# Altium PCB PS2 CONECTOR.PcbDoc
Units mm, origin at the board's own origin, x right, y up, seen from the top; angles counter-clockwise.
Board outline 152.4 x 101.6 mm, 2 copper layers (Top Layer, Bottom Layer); 9 components, 7 nets, 43 pads, 0 vias.
Unrouted connection lines stored in the file: 2.
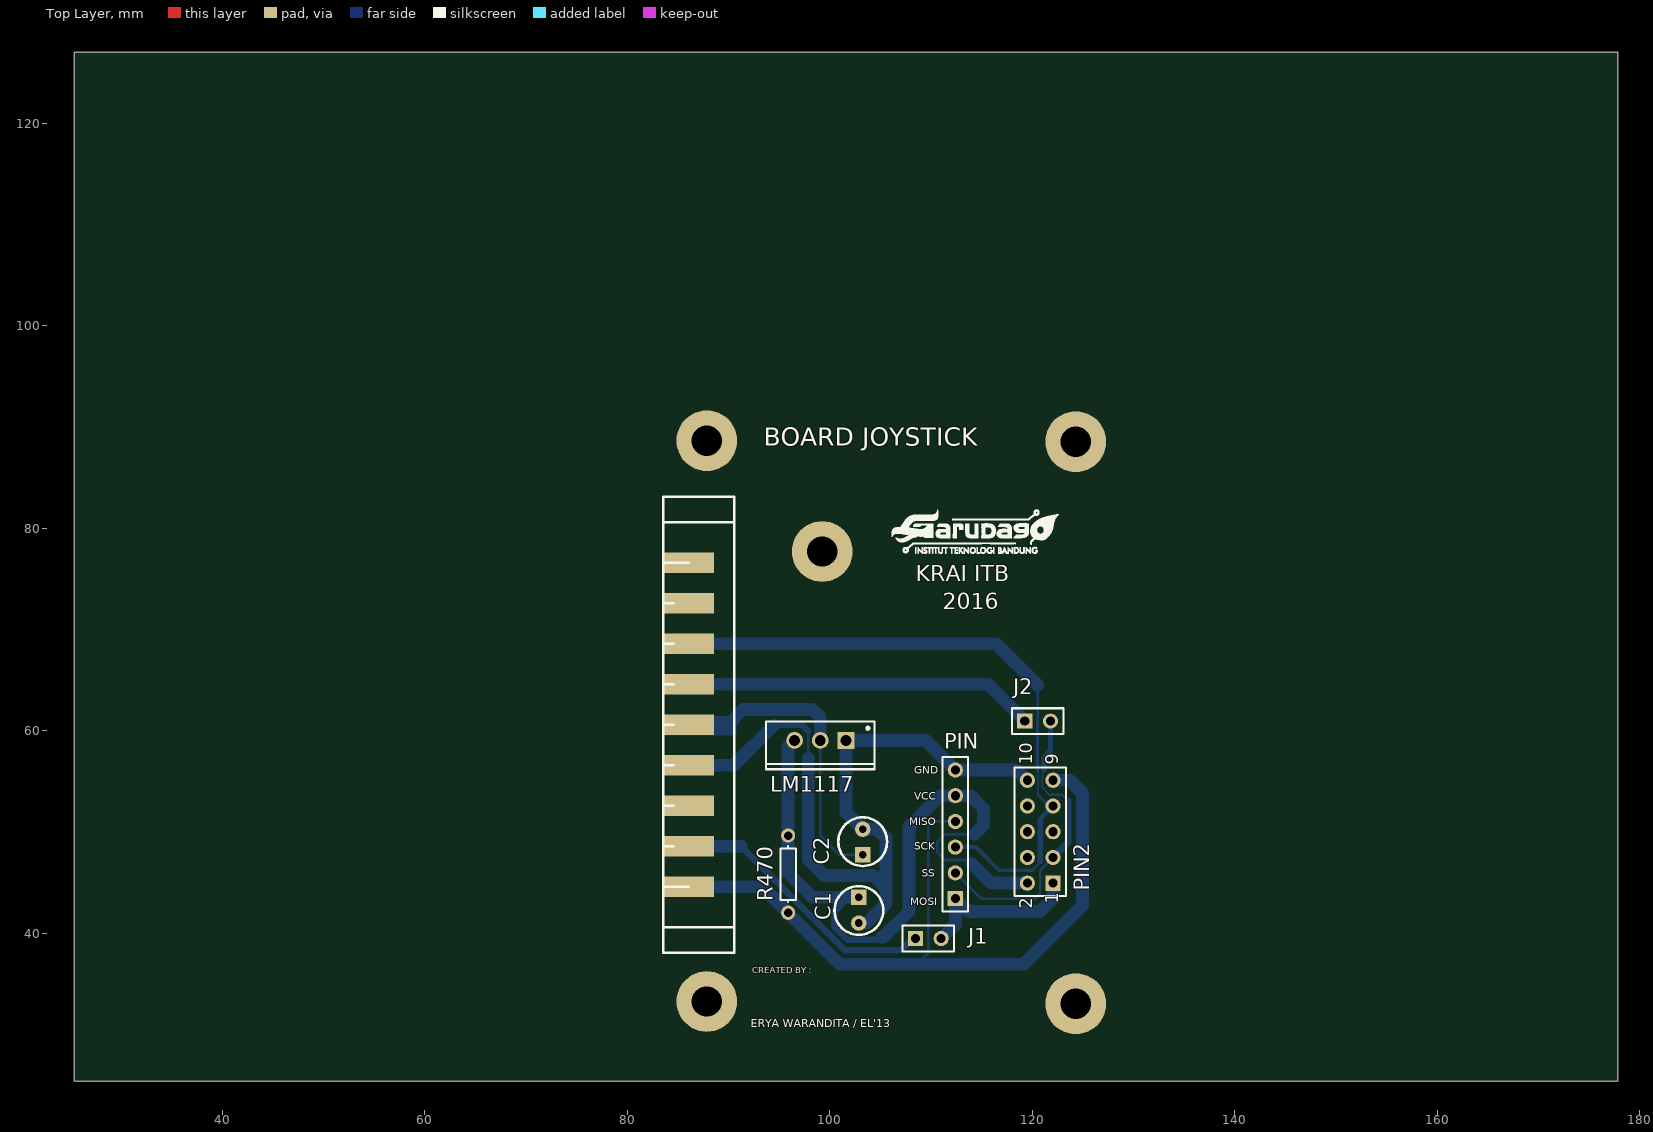
[diagram p0: Top Layer view]
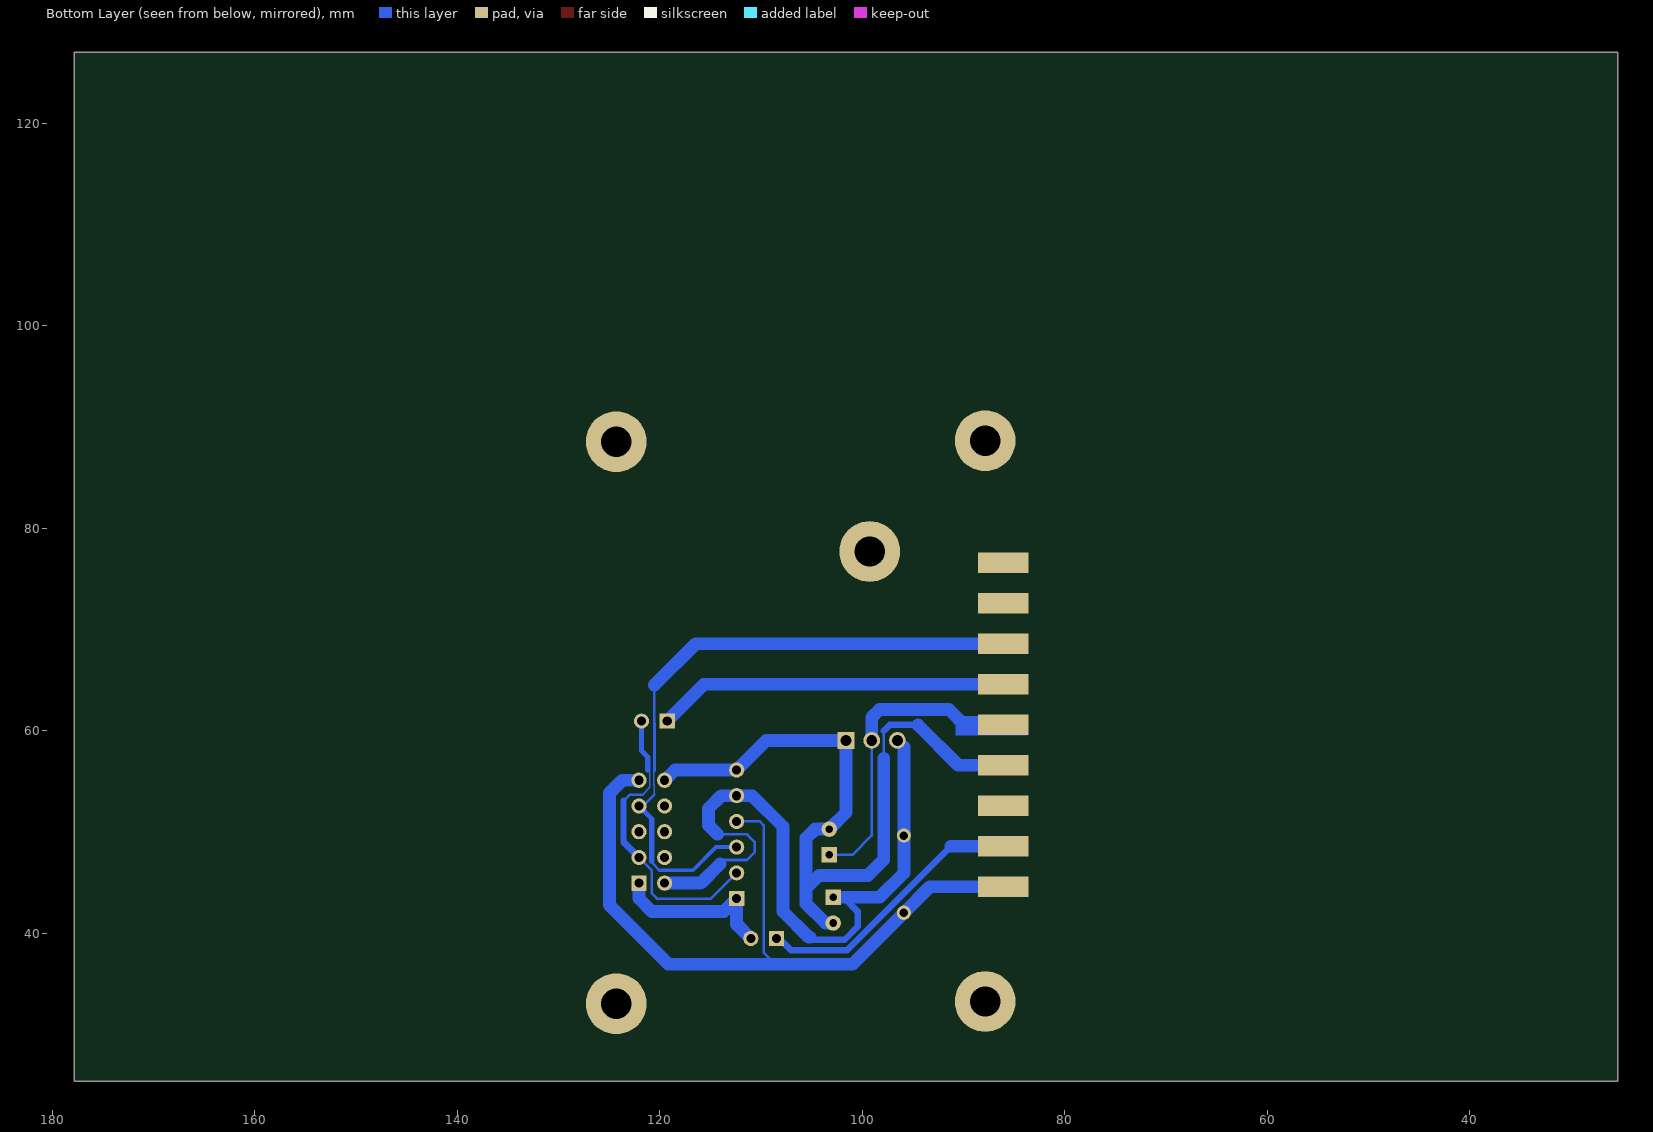
[diagram p1: Bottom Layer view, seen from below]

## Layer stack, top to bottom
Top Layer: signal copper 0.0356
Dielectric: dielectric 0.32, FR-4, Dk 4.8
Bottom Layer: signal copper 0.0356

## Board outline
25.4,25.4 177.8,25.4 177.8,127 25.4,127

## Design rules (kind name [scope] priority, off if disabled: settings)
Clearance [All] p1: gap=0.254
PolygonConnect [All] p1: connectstyle=Relief reliefconductorwidth=0.254 reliefentries=4 polygonreliefangle="90 Angle" airgapwidth=0.254
RoomDefinition "PS2 CONECTOR" [InComponentClass('PS2 CONECTOR')] p1: confinementstyle=ConfineIn formatcopy=TRUE lockcomponents=FALSE outline 82.042,29.21 128.651,29.21 128.651,92.964 82.042,92.964
RoutingVias [All] p1: holewidth=0.711 width=1.27 viastyle="Through Hole" minholewidth=0.711 minwidth=1.27 maxholewidth=0.711 maxwidth=1.27
SolderMaskExpansion [All] p1: expansion=0.102
Width [All] p1: maxlimit=1.27 minlimit=0.051 preferedwidth=0.127
28 further rules are at their usual default settings.

## Classes and differential pairs
component class "PS2 CONECTOR": "BOARD JOYSTICK" C1 C2 LM1117 PIN PIN2 R470

## Components (designator, comment, footprint, x,y, rotation, side; value= is the part's Value field where it differs from the comment)
"BOARD JOYSTICK" "JOYSTICK SOCKET" "JOY SOCKET" 83.566,38.1 r0 top (schematic designator JOYSTICK)
C1 "cap 10uF/16V" "cap 10uF/16V" 102.87,41.021 r270 top
C2 "cap 10uF/16V" "cap 10uF/16V" 103.251,50.292 r90 top
J1 "Comment" HDR1X2 108.458,39.497 r0 top
J2 "Comment" HDR1X2 119.253,60.96 r0 top
LM1117 "LM1117T-3.3" T03B 99.06,59.055 r180 top
PIN "Header 6" HDR1X6 112.395,43.434 r90 top
PIN2 "Header 5X2" HDR2X5 122.047,44.958 r90 top
R470 "Res1" AXIAL-0.3 95.885,45.847 r90 top

## Footprints (in the part's own frame and the unit in brackets; to place one, negate y for a bottom-side part, rotate by r counter-clockwise, add the part's x,y. Pads: shape width x height; smd on the part's side, far side on the other; paste and mask are expansions set on the pad)
AXIAL-0.3 [mm] "Axial Device, Thru-Hole; 2 Leads; 0.3 in Pin Spacing"
  round 1.4 hole 0.85: 1(-3.81,0) 2(3.81,0)
  silkscreen extent -2.77,-0.76 2.77,0.76
"cap 10uF/16V" [mil]
  rect 60x60 hole 30: 1(-100,0)
  round 60 hole 30: 2(0,0)
  silkscreen extent -144,-95 46,95
HDR1X2 [mm] "Connector; Header; 2 Position"
  rect 1.5x1.5 hole 0.9: 1(0,0)
  round 1.5 hole 0.9: 2(2.54,0)
  silkscreen extent -1.27,-1.27 3.81,1.27
HDR1X6 [mm] "Connector; Header; 6 Position"
  rect 1.5x1.5 hole 0.9: 1(0,0)
  round 1.5 hole 0.9: 2(2.54,0) 3(5.08,0) 4(7.62,0) 5(10.16,0) 6(12.7,0)
  silkscreen extent -1.27,-1.27 13.97,1.27
HDR2X5 [mm] "Connector; Header; 5x2 Position"
  rect 1.5x1.5 hole 0.9: 1(0,0)
  round 1.5 hole 0.9: 2(0,2.54) 3(2.54,0) 4(2.54,2.54) 5(5.08,0) 6(5.08,2.54) 7(7.62,0) 8(7.62,2.54) 9(10.16,0) 10(10.16,2.54)
  silkscreen extent -1.27,-1.27 11.43,3.81
"JOY SOCKET" [mm]
  rect 5x2 all layers, no hole: 1(2.5,6.5) 2(2.5,10.5) 3(2.5,14.5) 4(2.5,18.5) 5(2.5,22.5) 6(2.5,26.5) 7(2.5,30.5) 8(2.5,34.5) 9(2.5,38.5)
  silkscreen extent 0,0 7,45
T03B [mil] "TO, Thru-Hole, Vertical, Heatsink Mounted; 3 In-Line Leads; Pitch 2.54 mm"
  rect 65x65 hole 42.01: 1(-100,0)
  round 65 hole 42.01: 2(0,0) 3(100,0)
  silkscreen extent -211,-73 211,112, body extent -213,-75 213,114, height 764

## Part data
"BOARD JOYSTICK": library part "Socket joystick"
LM1117: "800mA Low-Dropout Linear Regulator, 3-pin TO-220"
PIN: "Header, 6-Pin"
PIN2: "Header, 5-Pin, Dual row"
R470: "Resistor"

## Free pads (board coordinates)
  round 6 hole 3: 11(87.86,33.276) 11(87.86,88.648) 11(99.258,77.709) 11(124.29,33.053) 11(124.29,88.552)

## Nets (pads, with @x,y where several pads share a name; then routed paths per layer and width w, separated by ;. In a path a pad name is that pad's centre, name@x,y a point inside that pad or via, vN(x,y) a via of type N, cw(c..) or ccw(c..) an arc to the next point about the centre after c; other vN are vias at no path point)
GND: "BOARD JOYSTICK.4" C1.2 C2.2 LM1117.1 PIN2.10 PIN.6 | length 76.8
  Bottom Layer w0.203: 97.875,57.277 97.875,59.986
  Bottom Layer w0.254: 97.853,60.008 97.875,59.986
  Bottom Layer w0.635: 94.488,60.579 97.282,60.579 97.853,60.008 97.853,59.986
  Bottom Layer w1.27: 86.066,56.6 90.509,56.6 94.488,60.579 ; 97.875,57.277 97.875,47.286 99.441,45.72 104.267,45.72 105.537,44.45 ; C1.2 103.632,41.021 105.537,42.926 105.537,44.45 ; PIN2.10 118.491,56.134 PIN.6 109.474,59.055 LM1117.1 101.6,51.943 C2.2 104.648,50.292 105.537,49.403 105.537,44.45
MISO: "BOARD JOYSTICK.1" PIN2.9 PIN.4 R470.1 | length 89.3
  Bottom Layer w0.254: 108.585,36.957 109.728,38.1 109.728,50.673 110.109,51.054 PIN.4 ; 123.698,55.118 124.079,55.118 124.587,54.61 124.587,54.229 124.587,42.418
  Bottom Layer w1.27: 86.066,44.6 93.322,44.6 R470.1 100.965,36.957 108.585,36.957 119.126,36.957 124.587,42.418 124.968,42.799 124.968,53.848 124.587,54.229 123.698,55.118 PIN2.9
MOSI: "BOARD JOYSTICK.2" J1.1 J1.2 PIN2.1 PIN.1 | length 43.9
  Bottom Layer w0.254: J1.1@108.204,39.497 J1.1
  Bottom Layer w0.635: 91.227,48.6 101.473,38.354 107.061,38.354 J1.1@108.204,39.497
  Bottom Layer w1.27: 86.066,48.6 91.227,48.6 ; J1.2 112.395,40.894 PIN.1 113.665,42.164 120.777,42.164 122.047,43.434 PIN2.1
SCK: "BOARD JOYSTICK.7" PIN2.7 PIN.3 | length 69
  Bottom Layer w0.127: 120.523,53.721 120.523,54.624 120.575,54.676 120.575,60.273 120.523,60.325
  Bottom Layer w0.254: 120.015,46.228 120.777,46.99 ; 120.523,53.721 121.666,52.578 PIN2.7 ; 120.523,64.516 120.523,60.706 120.511,60.694 120.511,56.031 120.535,56.007
  Bottom Layer w0.381: PIN.3 114.427,48.514 116.713,46.228 120.015,46.228
  Bottom Layer w0.508: 120.765,47.114 120.777,47.126 120.777,51.308 PIN2.7
  Bottom Layer w1.27: 86.066,68.6 116.439,68.6 120.523,64.516
SS: "BOARD JOYSTICK.6" J2.1 J2.2 PIN2.3 PIN.2 | length 64.6
  Bottom Layer w0.127: 120.979,56.134 120.979,54.408 121.678,53.709
  Bottom Layer w0.254: PIN.2 114.935,43.434 120.269,43.434 120.777,43.942 120.777,46.228 PIN2.3 ; 121.678,53.709 122.948,53.709 123.571,53.086
  Bottom Layer w0.508: 121.17,56.134 121.17,57.416 121.793,58.039 J2.2
  Bottom Layer w0.635: PIN2.3 123.571,49.022 123.571,53.086
  Bottom Layer w1.27: 86.066,64.6 115.613,64.6 J2.1
V33: "BOARD JOYSTICK.5" C2.1 LM1117.2 | length 30.7
  Bottom Layer w0.254: LM1117.2 99.06,49.657 100.965,47.752 C2.1
  Bottom Layer w1.27: 86.066,60.6 86.214,60.452 89.789,60.452 91.44,62.103 98.298,62.103 99.06,61.341 LM1117.2
VCC: C1.1 LM1117.3 PIN2.2 PIN.5 R470.2 | length 70.1
  Bottom Layer w0.254: 95.885,58.42 LM1117.3 ; 101.727,43.434 101.854,43.561 C1.1 ; 114.046,46.863 113.665,47.244 111.379,47.244 110.617,48.006 110.617,49.022 111.379,49.784 114.3,49.784
  Bottom Layer w0.635: 101.727,43.434 100.457,42.164 100.457,40.64 101.727,39.37 105.156,39.37 105.664,39.878
  Bottom Layer w1.27: 95.885,58.42 R470.2 95.885,45.974 98.298,43.561 101.854,43.561 ; 105.156,39.624 105.283,39.624 107.823,42.164 107.823,50.546 110.871,53.594 PIN.5 113.919,53.594 115.189,52.324 115.189,50.673 114.3,49.784 ; 114.046,46.863 115.951,44.958 PIN2.2
pads on no net: "BOARD JOYSTICK.3" "BOARD JOYSTICK.8" "BOARD JOYSTICK.9" PIN2.4 PIN2.5 PIN2.6 PIN2.8

## Other copper
Bottom Layer:
  rectangle net V33: 83.693,59.563 90.805,61.468

## Silkscreen, mask and mechanical layers (free items; w line width, h text height)
Top Overlay:
  drawing of 1836 lines, arcs and shapes, not listed
  text "KRAI ITB" at 108.509,74.778 h1.6
  text "2016" at 111.176,71.984 h1.6
  text "GND" at 108.331,55.753 h0.76
  text "VCC" at 108.331,53.213 h0.76
  text "MISO" at 107.823,50.673 h0.76
  text "SCK" at 108.331,48.26 h0.76
  text "SS" at 109.093,45.593 h0.76
  text "MOSI" at 107.95,42.799 h0.76
  text "CREATED BY :" at 92.329,36.068 h0.6
  text "ERYA WARANDITA / EL'13" at 92.202,30.734 h0.8

## Text inside footprints (layer, text, board x,y; h text height)
PIN2: Top Overlay "10" at 120.015,56.642 h1.27 r90; Top Overlay "9" at 122.555,56.642 h1.27 r90; Top Overlay "1" at 122.555,42.926 h1.27 r90; Top Overlay "2" at 120.015,42.418 h1.27 r90